# Altium PCB GPS.PcbDoc
Units mm, origin at the board's own origin, x right, y up, seen from the top; angles counter-clockwise.
Board outline 13.33 x 13.46 mm, 2 copper layers (Top Layer, Bottom Layer); 13 components, 13 nets, 52 pads, 17 vias.
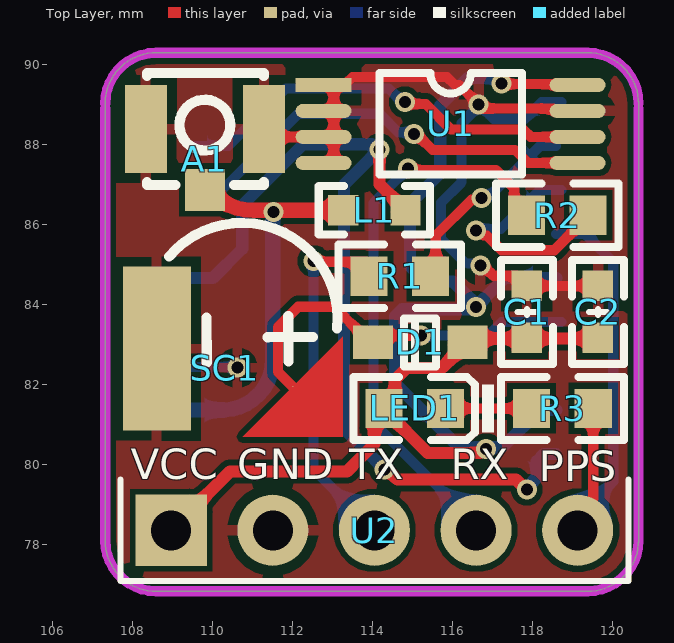
[diagram p0: Top Layer view]
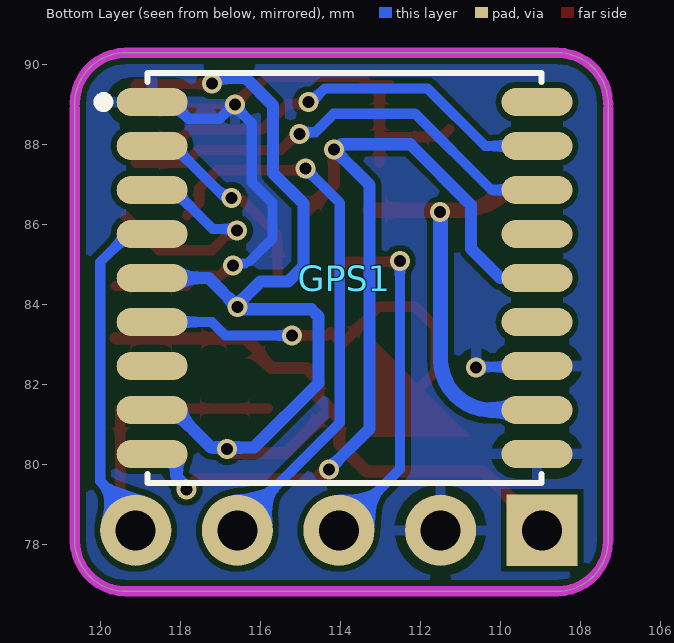
[diagram p1: Bottom Layer view, seen from below]
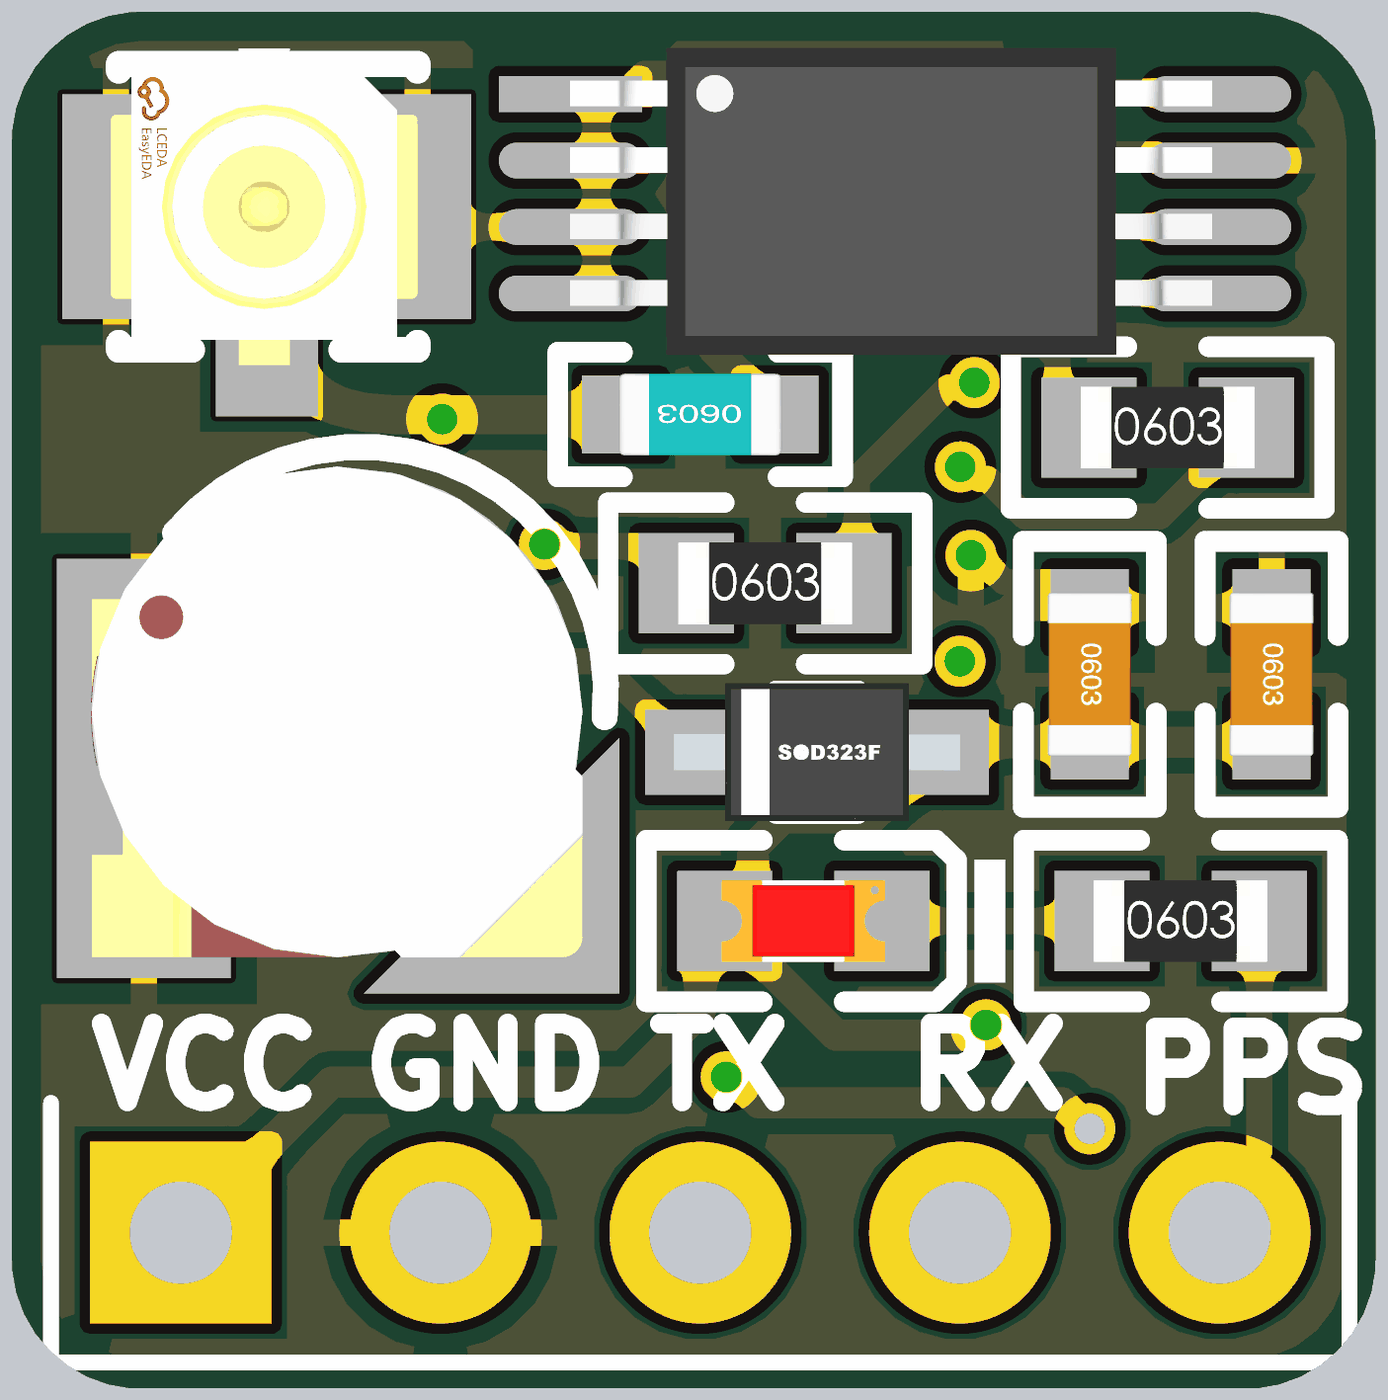
[diagram p2: 3D render of the assembled board from above, using the file's embedded part models]

## Layer stack, top to bottom
Top Solder: solder mask 0.0102, Solder Resist, Dk 3.5
Top Layer: signal copper 0.0356
Dielectric 1: dielectric 0.32, FR-4, Dk 4.8
Bottom Layer: signal copper 0.0356
Bottom Solder: solder mask 0.0102, Solder Resist, Dk 3.5

## Board outline
107.315,78.105 107.315,89.027 cw(c108.585,89.027) 108.585,90.297 119.38,90.297 cw(c119.38,89.027) 120.65,89.027 120.65,78.105 cw(c119.38,78.105) 119.38,76.835 108.585,76.835 cw(c108.585,78.105)

## Design rules (kind name [scope] priority, off if disabled: settings)
Clearance [All] p1: gap=0.15 ignorepadtopadclearanceinfootprint=FALSE
PolygonConnect [All] p1: connectstyle=Relief reliefconductorwidth=0.254 reliefentries=4 polygonreliefangle="90 Angle" airgapwidth=0.254
RoutingVias [All] p1: holewidth=0.711 width=1.27 viastyle="Through Hole" minholewidth=0.711 minwidth=1.27 maxholewidth=0.711 maxwidth=1.27
SolderMaskExpansion [All] p1: expansion=0.102 istentingtop=FALSE
Width [All] p1: maxlimit=0.381 minlimit=0.203 preferedwidth=0.254
30 further rules are at their usual default settings.

## Components (designator, comment, footprint, x,y, rotation, side; value= is the part's Value field where it differs from the comment)
A1 "IPEX1-TXZ" ipex1 109.806,87.629 r180 top
C1 "0.1uF" 0603_C 117.856,83.82 r270 top
C2 "0.1uF" 0603_C 119.634,83.82 r270 top
D1 "1N4148" 1N4148 115.189,83.058 r0 top
GPS1 "ATGM336H-5N31" ATGM336H-5N-31 113.778,84.793 r180 bottom
L1 "47nH" 0603_L 114.046,86.36 r180 top
LED1 "RED" LED0603 115.054,81.407 r180 top
R1 "51Ω" 0603_R 114.681,84.709 r0 top
R2 "51Ω" 0603_R 118.618,86.233 r0 top
R3 "51Ω" 0603_R 118.745,81.407 r0 top
SC1 "XH414HG-IV01E_C38065" XH414HG 110.617,82.423 r270 top value=80000uF
U1 "AT24C32A" AT24C32A 115.951,88.519 r0 top
U2 "HEADER" HEADER 113.919,78.359 r0 top

## Footprints (in the part's own frame and the unit in brackets; to place one, negate y for a bottom-side part, rotate by r counter-clockwise, add the part's x,y. Pads: shape width x height; smd on the part's side, far side on the other; paste and mask are expansions set on the pad)
1N4148 [mm]
  rect 1x0.83 smd: 1(1.18,0) 2(-1.18,0)
  silkscreen extent -0.4,-0.6 0.4,0.6, body extent -1.4,-0.67 1.4,0.68, height 0.75
0603_C [mil] "无极性贴片电容"
  rect 30x30 smd: 1(-25.59,0) 2(25.59,0)
  silkscreen extent -51,-26 51,26, body extent -31,-16 32,16, height 33
0603_L [mil] "小功率贴片电感"
  rect 30x30 smd: 1(-30.59,0) 2(30.59,0)
  silkscreen extent -55,-24 55,24, body extent -31,-16 32,16, height 31
0603_R [mm]
  rect 0.93x0.98 smd: 1(-0.77,0) 2(0.77,0)
  silkscreen extent -1.53,-0.79 1.54,0.79, body extent -0.85,-0.4 0.85,0.4, height 0.56
AT24C32A [mm] "TSSOP-8_L3.0-W4.4-H1.0-LS6.4-P0.65"
  rect 1.4x0.35 smd: 1(-3.175,0.975)
  oval 1.4x0.35 smd: 2(-3.175,0.325) 3(-3.175,-0.325) 4(-3.175,-0.975) 5(3.175,-0.975) 6(3.175,-0.325) 7(3.175,0.325) 8(3.175,0.975)
  silkscreen extent -1.78,-1.27 1.78,1.27, body extent -3.18,-1.58 3.1,1.42, height 1.14
ATGM336H-5N-31 [mm]
  oval 1.773x0.7 smd paste+0 mask+0.051: 1(-4.938,4.273) 2(-4.938,3.173) 3(-4.938,2.073) 4(-4.938,0.973) 5(-4.938,-0.127) 6(-4.938,-1.227) 7(-4.938,-2.327) 8(-4.938,-3.427) 9(-4.938,-4.527) 10(4.685,-4.527) 11(4.685,-3.427) 12(4.685,-2.327) 13(4.685,-1.227) 14(4.685,-0.127) 15(4.685,0.973) 16(4.685,2.073) 17(4.685,3.173) 18(4.685,4.273)
  silkscreen extent -6.28,-5.25 4.8,5, body extent -4.98,-5.18 4.72,4.92, height 2.4
HEADER [mil]
  rect 70x70 hole 39.37: 1(-195,0)
  round 70 hole 39.37: 2(-95,0) 3(5,0) 4(105,0) 5(205,0)
  silkscreen extent -245,-50 255,50
ipex1 [mm]
  rect 1x1.05 smd paste+0 mask+0.05: 1(0,0.763)
  rect 1.05x2.2 smd paste+0 mask+0.05: 2(-1.475,-0.763) 3(1.475,-0.763)
  silkscreen extent -1.47,-2.16 1.45,0.64, body extent -1.47,-2.31 1.53,0.79, height 1.26
LED0603 [mm]
  rect 0.93x0.98 smd: 1(0.77,0) 2(-0.77,0)
  silkscreen extent -1.97,-0.79 1.54,0.79, body extent -0.8,-0.4 0.8,0.4, height 0.6
XH414HG [mil]
  round 1 smd: 1(18.7,54.63)
  rect 161.4x66.93 smd paste+0 mask+2: 2(-18.7,-79.23)
  Top Layer region: -30.51,103.84 67.92,103.84 67.92,5.42 -30.51,103.84
  silkscreen extent -143,-67 -5,99, body extent -135,-100 54,90, height 73

## Part data
A1: JLCPCB Part Class="Extended Part", LCSC Part Name="IPEX天线座 内针 RF同轴连接器", Manufacturer="SHOU HAN(首韩)", Manufacturer Part="IPEX1-TXZ 142", Add into BOM=yes, Convert to PCB=yes, Datasheet=https://atta.szlcsc.com/upload/public/pdf/source/20220627/A0C2EF411B6F3EC53ED1A4F491E26EB6.pdf, Device="IPEX1-TXZ 142", Name="IPEX1-TXZ 142", Supplier=LCSC, Supplier Footprint=SMD, Supplier Part=C3151745, Symbol="IPEX1-TXZ 142"
C1 C2: library part 0603C, "capacitance"
D1: "diode", Package=SOD-323, SuppliersPartNumber=C2128, ComponentLink1Description=供应商链接, ComponentLink1URL=http://www.szlcsc.com/product/details_2485.html, Supplier=LC
GPS1: "GSM & GPRS & GPS Modules 9.7X10.1mm RoHS", Manufacturer_Name=ZHONGKEWEI, Datasheet Link=https://datasheet.lcsc.com/szlcsc/ZHONGKEWEI-ATGM336H-5N31_C90770.pdf, Geometry.Height=2.6mm, Manufacturer_Part_Number=ATGM336H-5N31
L1: library part 0603L, "inductance", Package=0805, SuppliersPartNumber=C1046, ComponentLink1Description=供应商链接, ComponentLink1URL=http://www.szlcsc.com/product/details_1398.html, Supplier=LC
LED1: library part LED_RED_1, "LED", Package=0603, SuppliersPartNumber=C2286, ComponentLink1Description=供应商链接, ComponentLink1URL=http://www.szlcsc.com/product/details_2659.html, Supplier=LC
R1 R2 R3: library part 0603R, "resistance", Package=0603, SuppliersPartNumber=C25819, ComponentLink1Description=供应商链接, ComponentLink1URL=http://www.szlcsc.com/product/details_26562.html, Supplier=LC
SC1: library part XH414HG, "super capicator", Equivalent Series Resistance(ESR)=-, JLCPCB Part Class="Extended Part", LCSC Part Name="80000uF 3.3V", Manufacturer=ABLIC(艾普凌科), Manufacturer Part=XH414HG-IV01E, Operating Temperature=-20℃~+60℃, Rated Voltage=3.3V, Add into BOM=yes, Body Height=-, Convert to PCB=yes, Cycle Life Expectancy=10000, Datasheet=https://atta.szlcsc.com/upload/public/pdf/source/20150910/1457707350979.pdf, Device=XH414HG-IV01E_C38065, Leakage Current(DCL)=-, Lifetime @ Temp=-, Name=80000uF, Supplier=LCSC, Supplier Footprint=SMD,4.8x1.85mm, Supplier Part=C38065, Symbol=XH414HG-IV01E, φD=4.8mm

## Via types
v1: diameter 0.5, hole 0.3, Top Layer to Bottom Layer, 17 vias

## Nets (pads, with @x,y where several pads share a name; then routed paths per layer and width w, separated by ;. In a path a pad name is that pad's centre, name@x,y a point inside that pad or via, vN(x,y) a via of type N, cw(c..) or ccw(c..) an arc to the next point about the centre after c; other vN are vias at no path point)
GND: A1.2 A1.3 C1.1 C2.1 GPS1.1 GPS1.10 GPS1.12 SC1.2 U1.1 U1.2 U1.3 U1.4 U1.7 U2.2 | length 22.4
  Top Layer w0.254: A1.2 111.479,88.194 U1.3@113.03,88.194 ; U1.1 113.301,89.494 113.349,89.542 113.349,89.545 113.498,89.693 115.856,89.693 116.06,89.49 116.166,89.49 v1(116.649,89.007) ; U1.4@113.03,87.544 U1.3@113.03,88.194 ; U1.1@113.03,89.494 U1.3@113.03,88.194 ; v1(116.693,84.983) 116.76,84.983 117.018,84.724 117.602,84.724 C1.1 C2.1 ; v1@116.7,88.976 116.772,88.904 118.515,88.904 118.575,88.844 U1.7
  Bottom Layer w0.254: GPS1.12 109.115,82.445 110.595,82.445 v1(110.617,82.423) ; 116.268,85.09 115.711,85.647 115.711,86.548 116.226,87.064 116.226,88.537 v1@116.649,88.96 ; 116.392,85.03 116.646,85.03 v1(116.693,84.983) ; v1(116.649,89.007) v1@116.649,88.96 ; GPS1.1 118.228,89.066 117.808,88.646 117.03,88.646 116.716,88.96 v1@116.649,88.96
NetA1_1: A1.1 GPS1.11 L1.2 | length 10
  Top Layer w0.381: A1.1 ccw(c111.03,88.091) 111.03,86.36 L1.2
  Bottom Layer w0.381: GPS1.11@109.474,81.366 110.308,81.366 ccw(c110.24,82.63) 111.506,82.63 v1@111.506,86.26
  other v1: 111.522,86.315
NetD1_2: D1.2 GPS1.6 SC1.1 | length 9.5
  Top Layer w0.254: SC1.1 111.633,82.319 111.633,83.439 112.141,83.947 113.044,83.947 113.636,83.355 113.636,83.346 D1.2@113.924,83.058 ; D1.2 114.263,83.312 114.347,83.228 v1(115.214,83.228)
  Bottom Layer w0.254: v1(115.214,83.228) 116.886,83.228 117.224,83.566 GPS1.6
NetGPS1_2: GPS1.2 R1.2 | length 5
  Top Layer w0.254: R1.2@115.578,84.709 115.578,85.728 116.475,86.625 116.68,86.625 v1(116.727,86.672)
  Bottom Layer w0.254: v1(116.727,86.672) 116.886,86.672 118.178,87.964 GPS1.2@118.589,87.964
NetGPS1_3: GPS1.3 R2.2 | length 5.9
  Top Layer w0.254: v1(116.59,85.848) 116.657,85.848 116.774,85.73 116.857,85.73 117.225,85.362 118.542,85.362 119.388,86.208 R2.2
  Bottom Layer w0.254: v1(116.59,85.848) 116.637,85.895 117.208,85.895 118.18,86.866 GPS1.3
NetLED1_2: LED1.2 R3.1 | length 2.2
  Top Layer w0.254: LED1.2 R3.1
PPS: GPS1.4 R3.2 U2.5 | length 12
  Top Layer w0.254: U2.5 119.126,78.771 119.515,79.16 R3.2
  Bottom Layer w0.254: GPS1.4@118.589,85.764 119.315,85.764 120.015,85.064 120.015,79.583 119.126,78.694 U2.5
RXD: R2.1 U2.4 | length 14.1
  Top Layer w0.254: v1(114.887,87.407) 114.934,87.36 117.089,87.36 117.539,86.91 117.539,86.542 R2.1
  Bottom Layer w0.254: v1(114.887,87.407) 114.025,86.545 114.025,81.051 116.586,78.489 U2.4
SCL: GPS1.17 U1.6 | length 10.8
  Top Layer w0.254: v1(114.808,89.062) 114.855,89.015 115.328,89.015 115.967,88.376 117.771,88.376 117.953,88.194 U1.6
  Bottom Layer w0.254: GPS1.17@109.474,87.966 110.392,87.966 111.834,89.408 114.396,89.408 114.741,89.062 v1(114.808,89.062)
SDA: GPS1.16 U1.5 | length 11
  Top Layer w0.254: v1(115.036,88.265) 115.103,88.265 115.5,87.868 117.56,87.868 117.884,87.544 U1.5
  Bottom Layer w0.254: GPS1.16@109.474,86.866 110.234,86.866 112.141,88.773 114.176,88.773 114.637,88.312 114.989,88.312 v1(115.036,88.265)
TXD: R1.1 U2.3 | length 9.2
  Top Layer w0.254: v1(112.522,85.09) 112.54,85.072 113.827,85.072 114.165,84.734 R1.1@114.165,84.709
  Bottom Layer w0.254: v1(112.522,85.09) 112.522,79.883 U2.3
VCC: C1.2 C2.2 D1.1 GPS1.5 GPS1.8 LED1.1 U1.8 U2.1 | length 37.8
  Top Layer w0.254: v1(117.221,89.535) 117.244,89.512 119.108,89.512 U1.8
  Top Layer w0.305: U2.1 110.438,79.831 113.359,79.831 113.669,80.141 113.669,80.144 114.046,80.521 114.046,81.169 LED1.1 ; v1(116.84,80.391) 116.787,80.391 116.685,80.289 115.377,80.289 114.284,81.382 LED1.1 ; C2.2 119.619,83.155 116.381,83.155 116.021,82.795 116.021,82.71 115.727,82.416 114.857,82.416 114.562,82.121 114.562,81.685 LED1.1
  Bottom Layer w0.305: v1@116.557,83.91 116.411,83.91 116.385,83.884 114.737,83.884 114.558,83.706 114.558,82.038 116.168,80.428 116.803,80.428 v1(116.84,80.391) 116.877,80.428 117.242,80.428 118.178,81.364 GPS1.8@118.589,81.364 ; v1(117.221,89.535) 117.168,89.535 117.04,89.663 116.377,89.663 115.693,88.979 115.693,87.285 114.935,86.527 114.935,85.598 114.935,84.963 115.316,84.582 116.008,84.582 116.586,84.004 v1(116.586,83.947) 117.303,84.664 GPS1.5@118.589,84.664
VCC_RF: GPS1.9 GPS1.14 L1.1 | length 22.5
  Top Layer w0.305: v1(114.173,87.884) 114.173,87.011 L1.1@114.594,86.589 ; v1(114.3,79.883) 114.367,79.883 114.621,79.629 117.584,79.629 117.838,79.375 v1(117.856,79.375) ; L1.1@114.594,86.589 L1.1
  Bottom Layer w0.305: GPS1.14@109.474,84.666 110.01,84.666 110.741,85.397 110.741,86.488 112.265,88.011 113.979,88.011 114.106,87.884 v1(114.173,87.884) 113.284,86.995 113.284,80.899 v1(114.3,79.883) ; v1(117.856,79.375) 117.856,79.428 118.104,79.676 118.104,80.083 118.284,80.264 GPS1.9@118.589,80.264
pads on no net: GPS1.7 GPS1.13 GPS1.15 GPS1.18

## Polygon pours and split planes (outlines as drawn)
GND on Top Layer "GND_L01_P002" (solid, remove dead copper, pour order 2): 107.315,78.105 107.315,89.027 cw(c108.585,89.027) 108.585,90.297 119.38,90.297 cw(c119.38,89.027) 120.65,89.027 120.65,78.105 cw(c119.38,78.105) 119.38,76.835 108.585,76.835 cw(c108.585,78.105)
GND on Bottom Layer "GND_L02_P003" (solid, remove dead copper, pour order 3): 107.315,78.105 107.315,89.027 cw(c108.585,89.027) 108.585,90.297 119.38,90.297 cw(c119.38,89.027) 120.65,89.027 120.65,78.105 cw(c119.38,78.105) 119.38,76.835 108.585,76.835 cw(c108.585,78.105)

## Keep-outs
Keep-Out Layer:
  lines w0.254: 107.315,88.9 107.315,78.105 ccw(c108.585,78.105) 108.585,76.835 119.38,76.835 ccw(c119.38,78.105) 120.65,78.105 120.65,88.9 ; 107.315,89.027 cw(c108.585,89.027) 108.585,90.297 119.38,90.297 cw(c119.38,89.027) 120.65,89.027

## Text inside footprints (layer, text, board x,y; h text height)
U2: Top Overlay "VCC" at 107.95,79.629 h0.76; Top Overlay "GND" at 110.617,79.629 h0.76; Top Overlay "TX" at 113.411,79.629 h0.76; Top Overlay "RX" at 115.951,79.629 h0.76; Top Overlay "PPS" at 118.15,79.59 h0.76